# Altium PCB V2_2.PcbDoc
Units mm, origin at the board's own origin, x right, y up, seen from the top; angles counter-clockwise.
Board outline 59.92 x 90.81 mm, 4 copper layers (Top Layer, VCC, GND, Bottom Layer), stack 0.603 mm thick; 30 components, 24 nets, 172 pads, 29 vias.
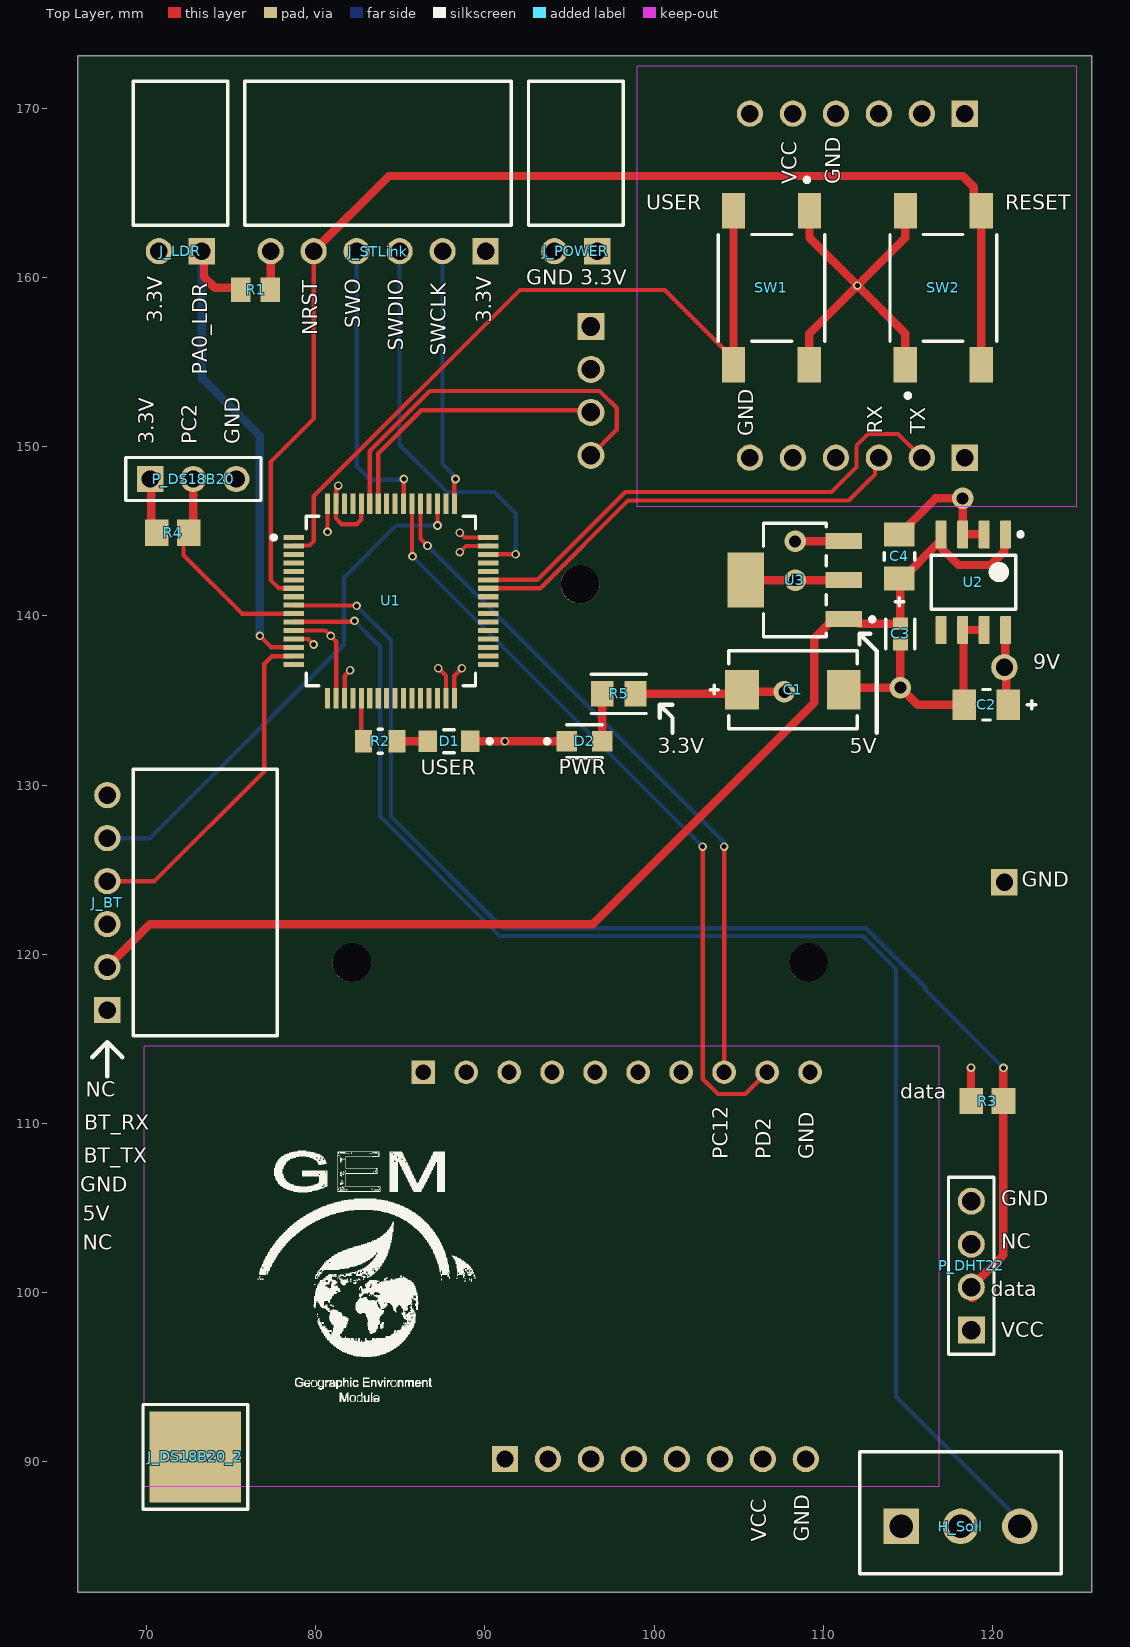
[diagram p0: Top Layer view]
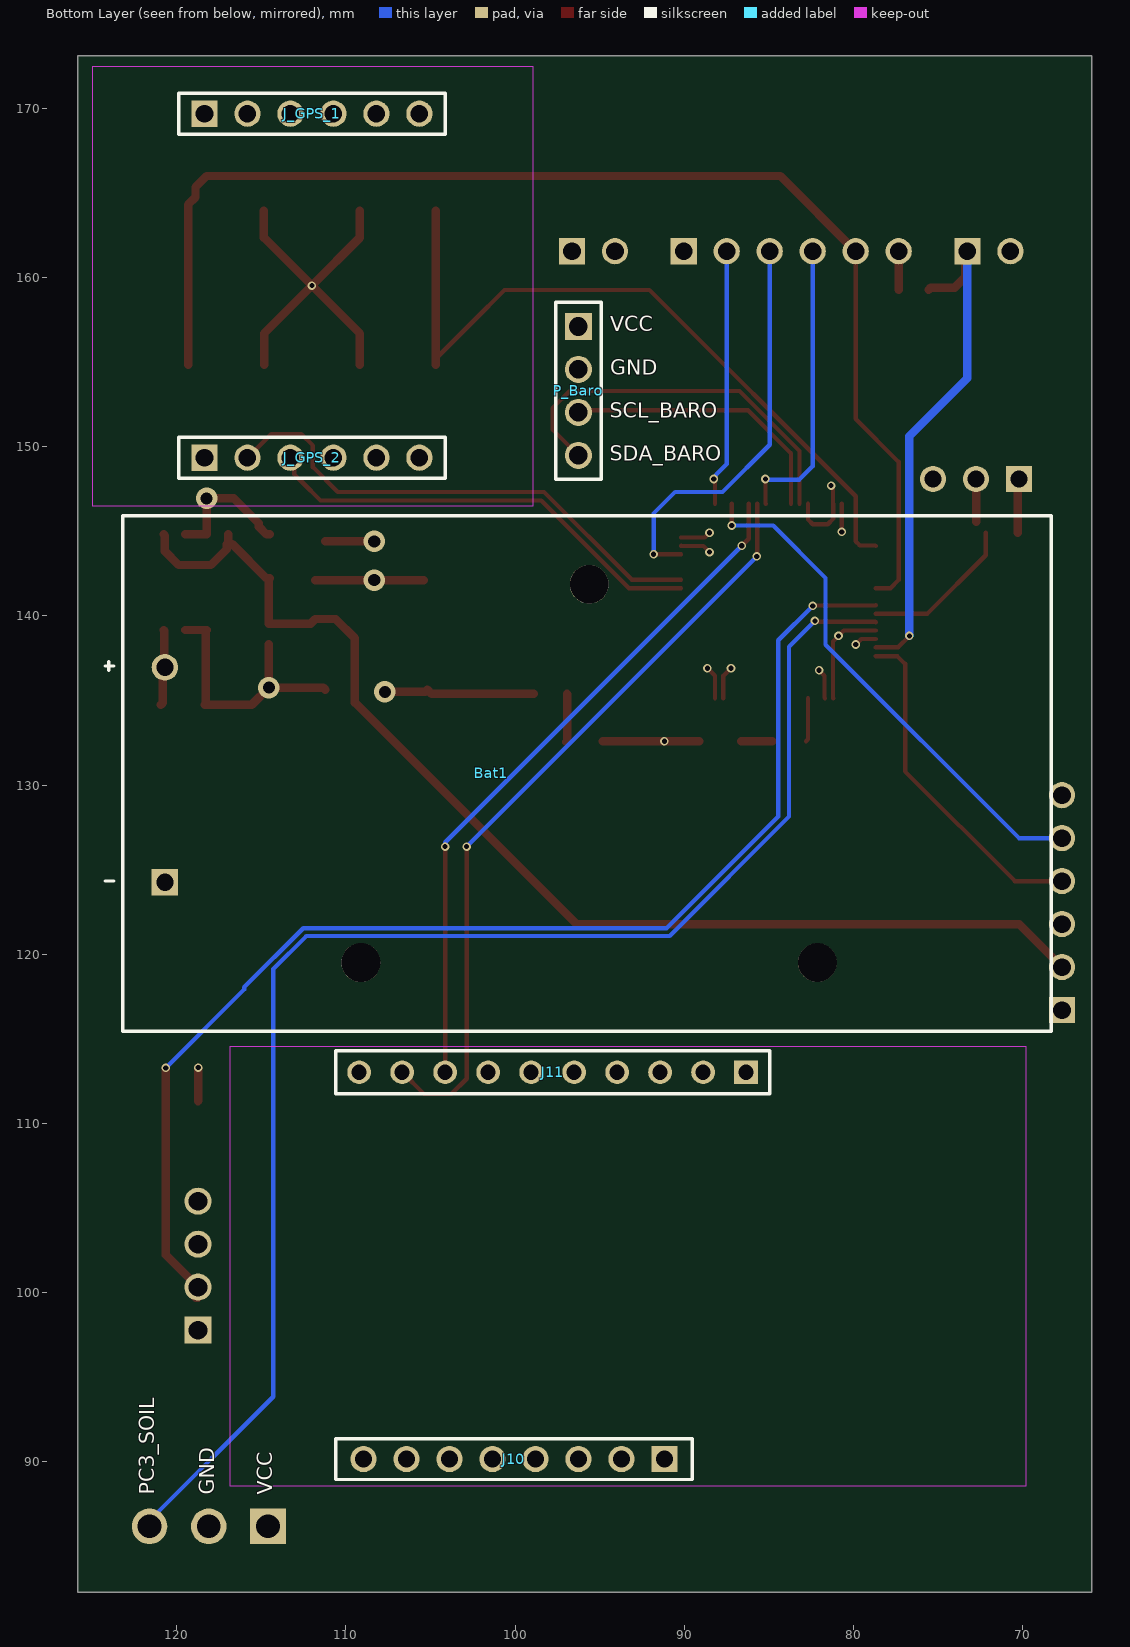
[diagram p1: Bottom Layer view, seen from below]
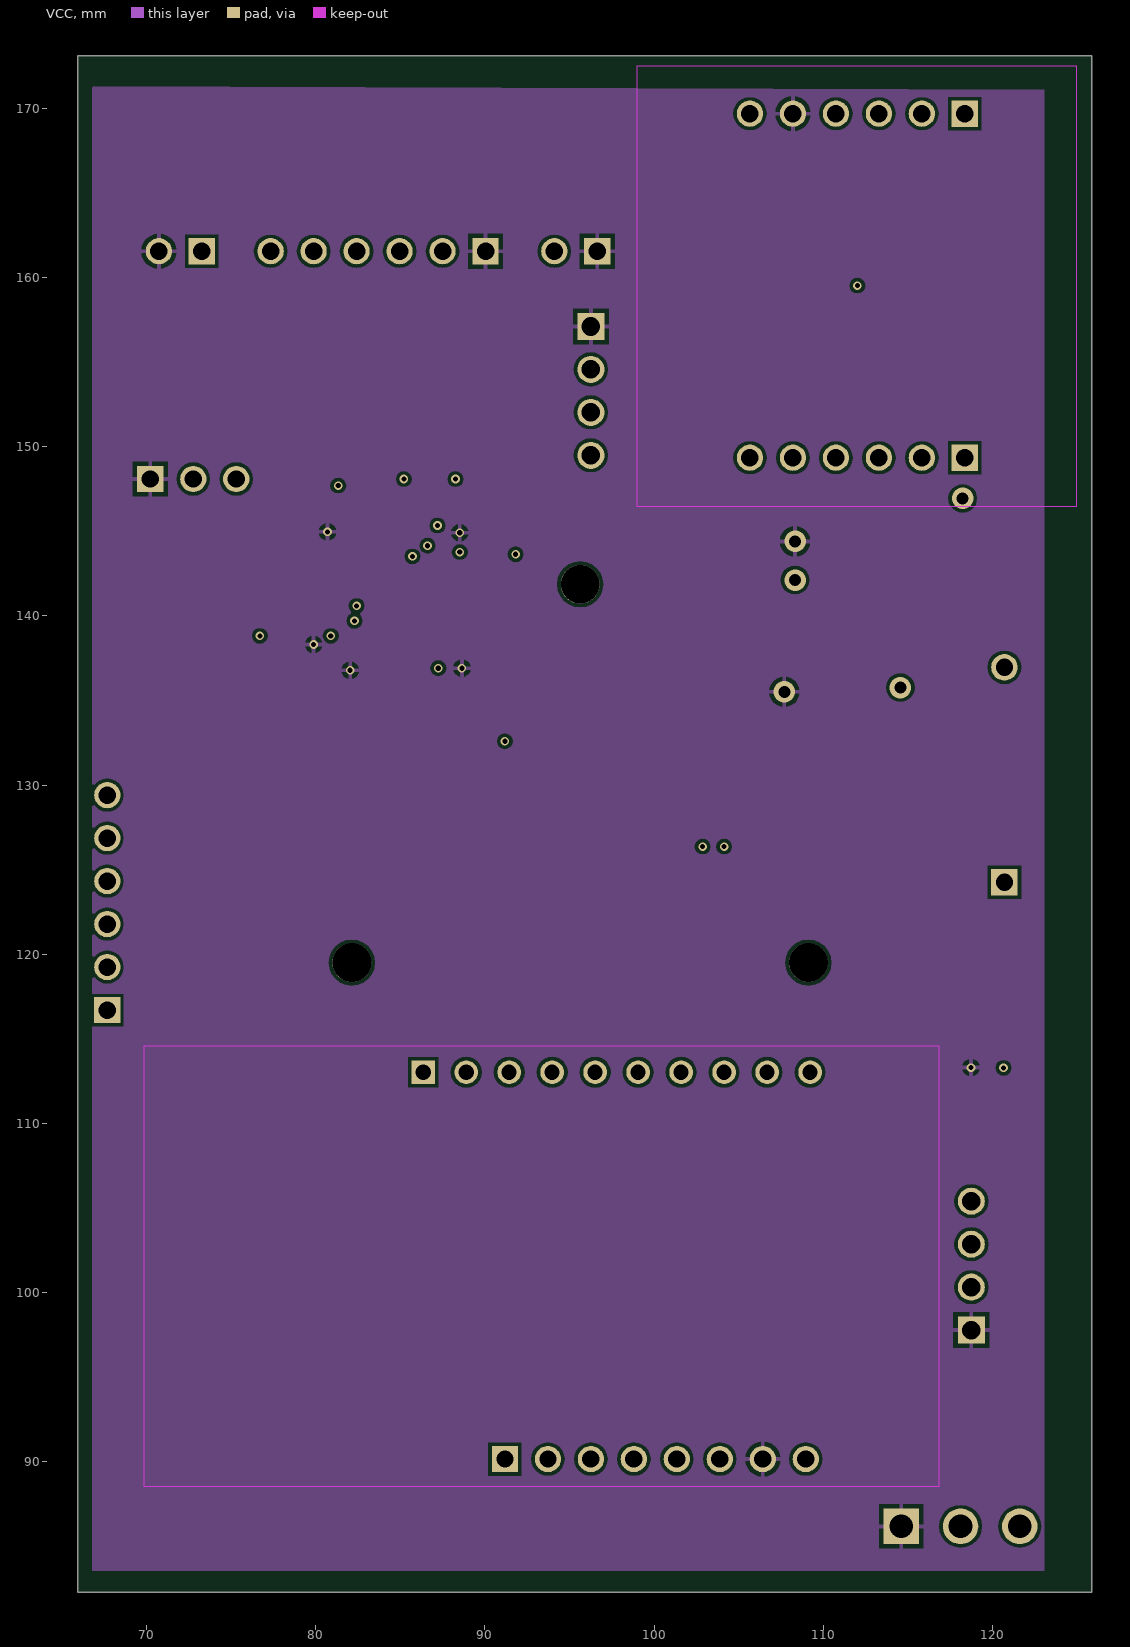
[diagram p2: VCC]
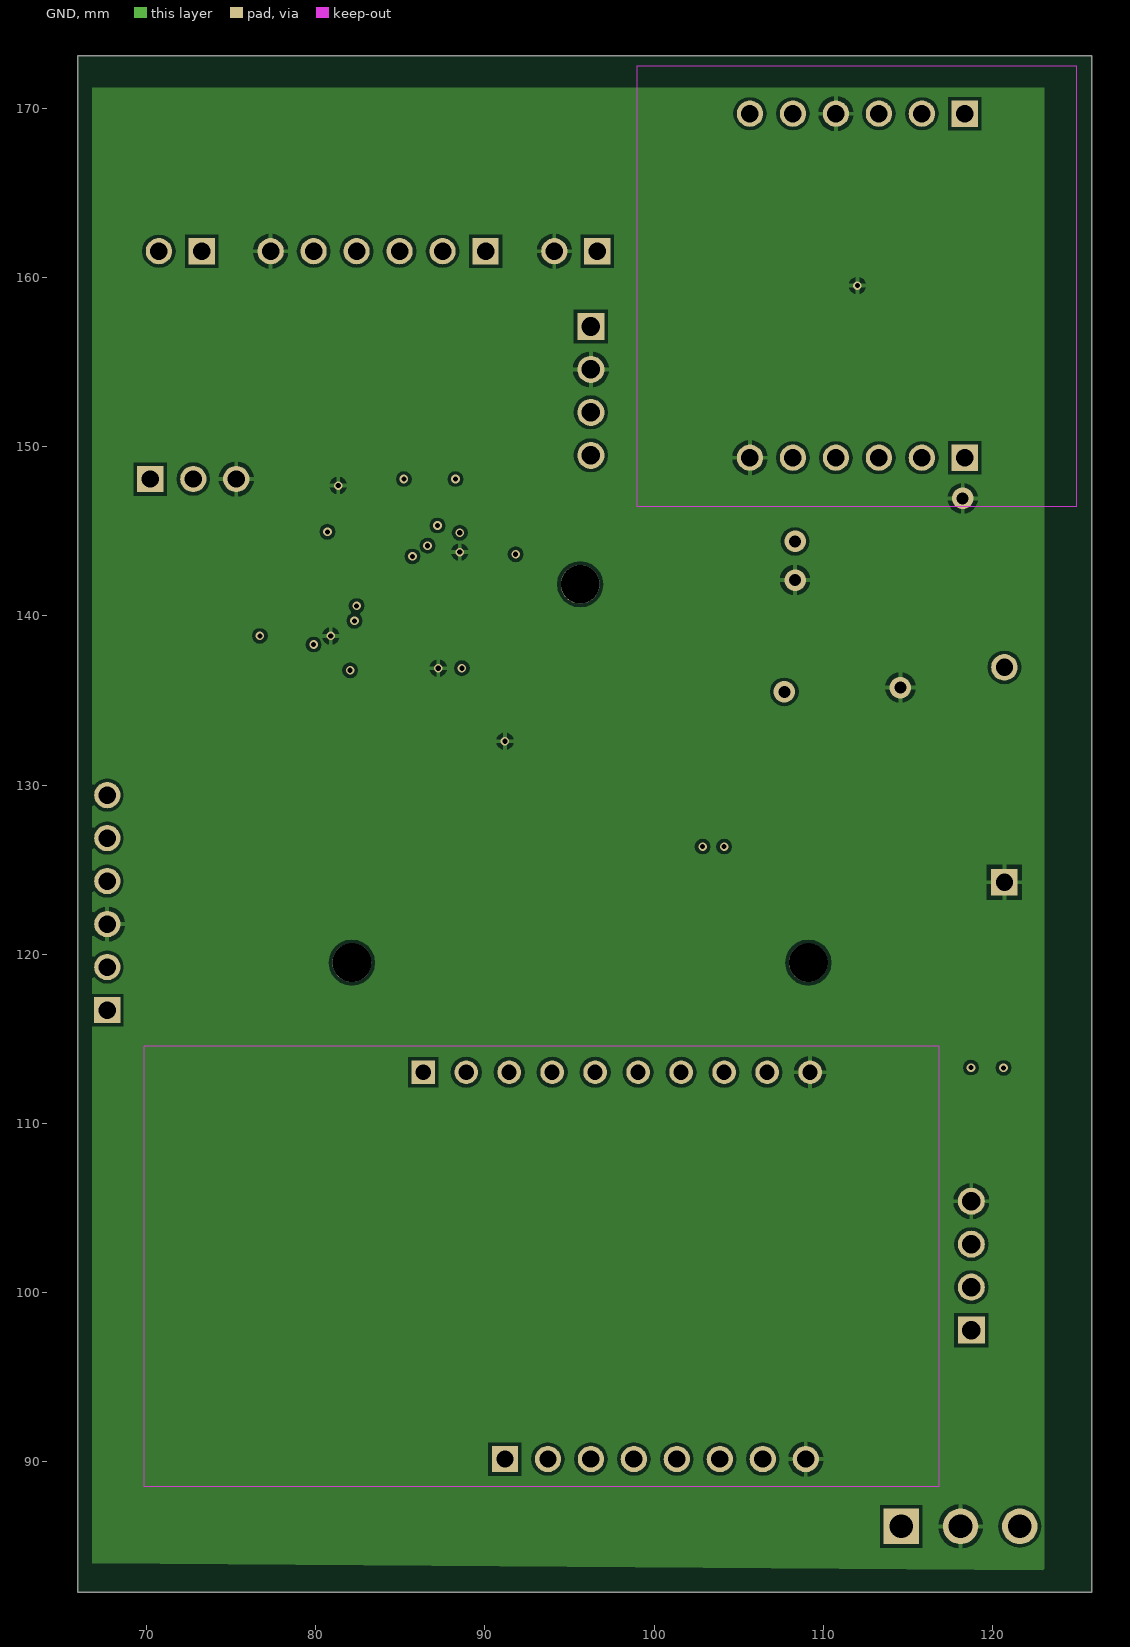
[diagram p3: GND]
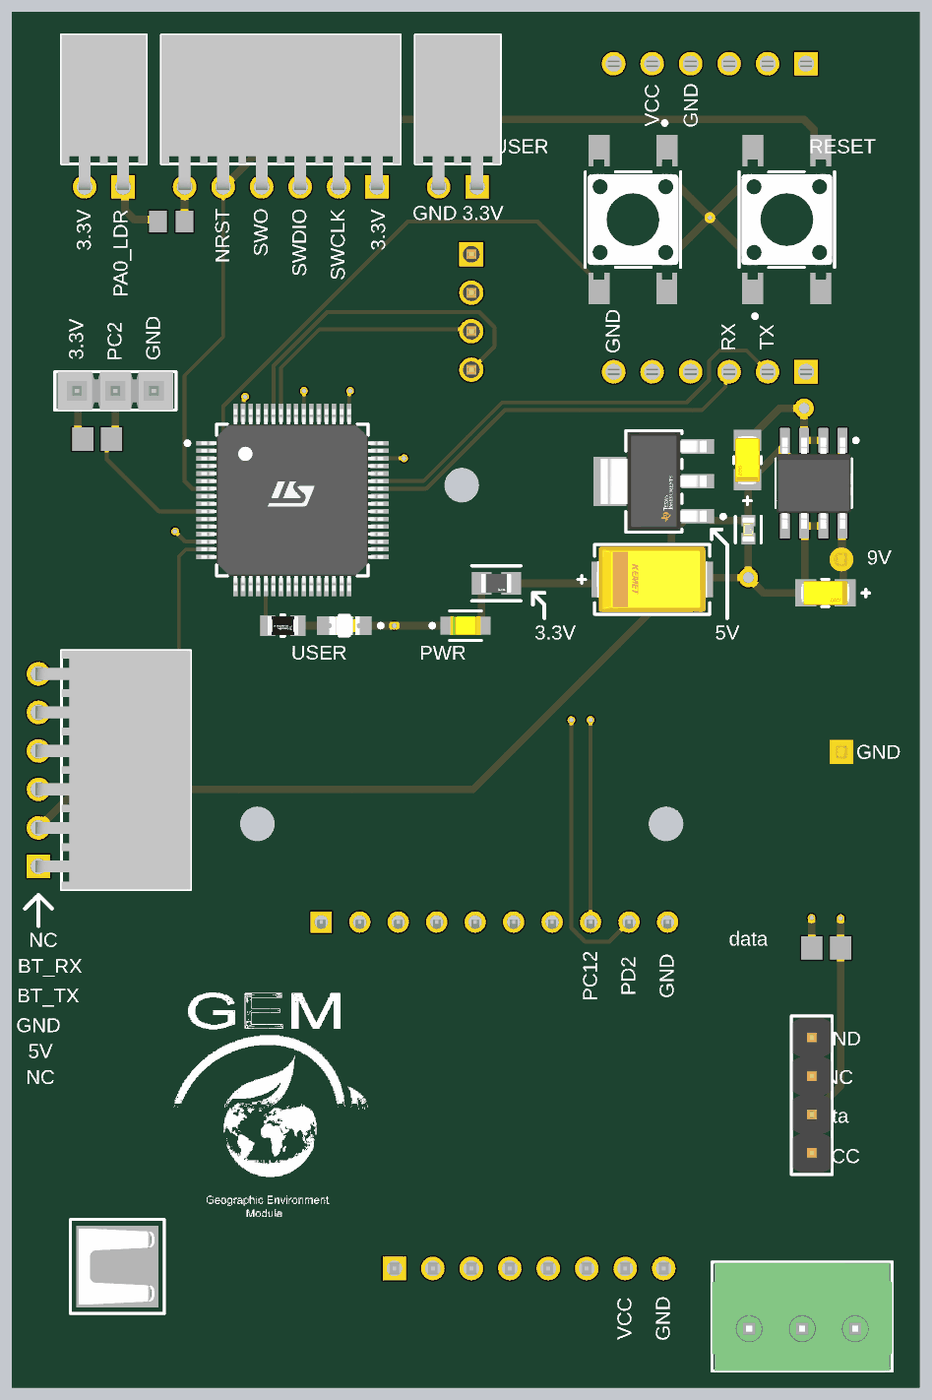
[diagram p4: 3D render of the assembled board from above, using the file's embedded part models]
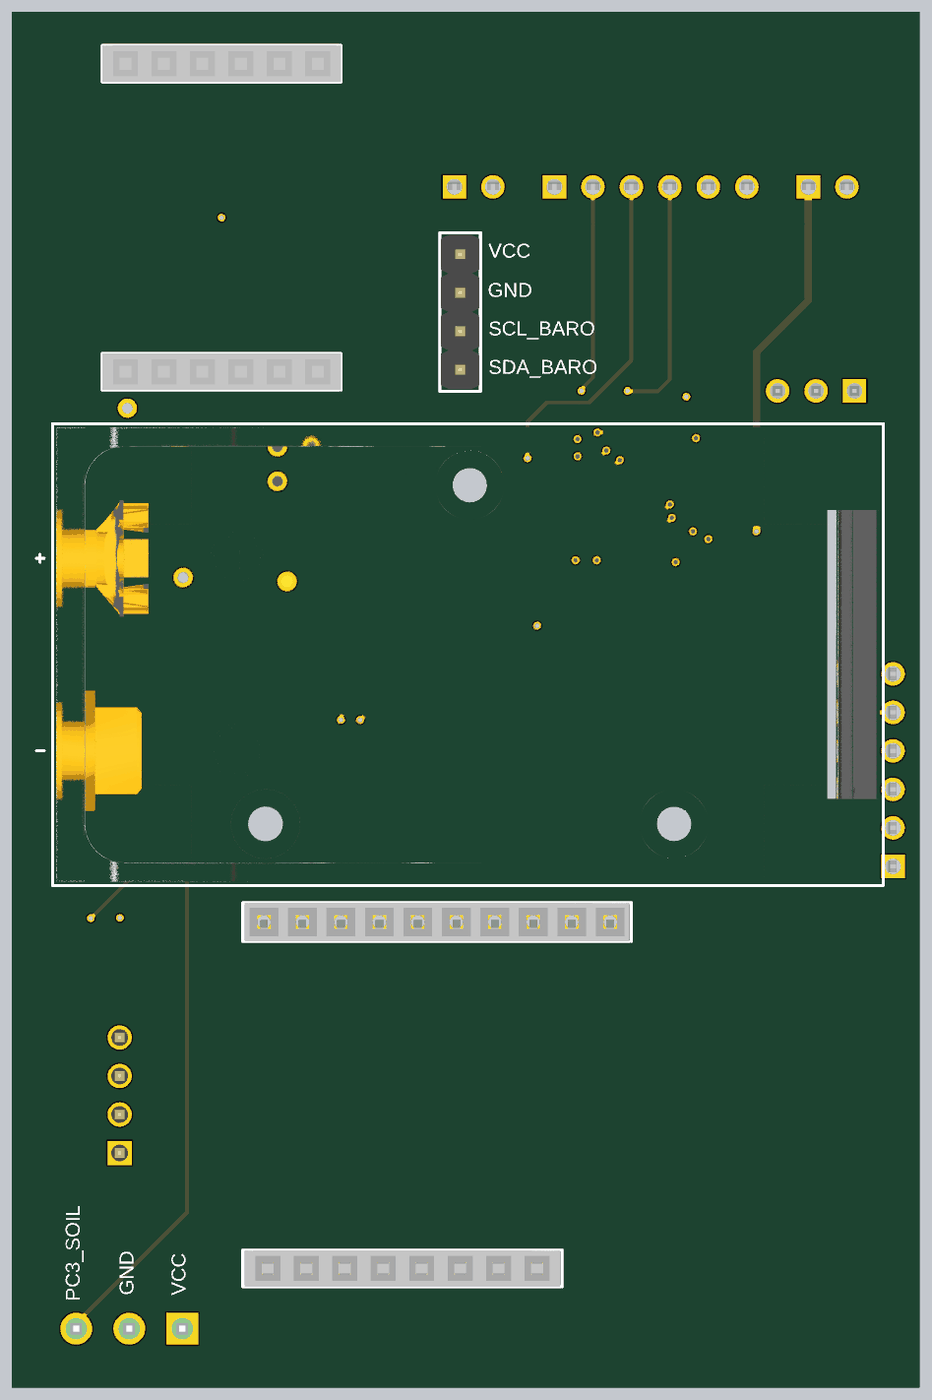
[diagram p5: 3D render of the assembled board from below, using the file's embedded part models]

## Layer stack, top to bottom
Top Solder: solder mask 0.0102, Solder Resist, Dk 3.5
Top Layer: signal copper 0.0356
Dielectric 2: prepreg 0.0711, PP-006, Dk 4.1
VCC: signal copper 0.035
Dielectric 1: dielectric 0.32, FR-4, Dk 4.8
GND: signal copper 0.035
Dielectric 3: prepreg 0.0711, PP-006, Dk 4.1
Bottom Layer: signal copper 0.0356
Bottom Solder: solder mask 0.0102, Solder Resist, Dk 3.5

## Board outline
125.857,173.101 125.857,82.296 65.939,82.296 65.939,173.101

## Design rules (kind name [scope] priority, off if disabled: settings)
Clearance [All] p1: gap=0.2 ignorepadtopadclearanceinfootprint=TRUE except(0: Arc-Hole Track-Hole SMDPad-Hole THPad-Hole Via-Hole Fill-Hole Poly-Hole Region-Hole Text-Hole)
PolygonConnect [All] p1: connectstyle=Relief reliefconductorwidth=0.254 reliefentries=4 polygonreliefangle="90 Angle" airgapwidth=0.254
RoomDefinition V2_2 [InComponentClass('V2_2')] p1 off: confinementstyle=ConfineIn formatcopy=TRUE lockcomponents=FALSE outline 0,85.09 22.098,85.09 22.098,66.802 0,66.802
RoutingVias [All] p1: holewidth=0.305 width=0.508 viastyle="Through Hole" minholewidth=0.305 minwidth=0.508 maxholewidth=0.711 maxwidth=1.27
SolderMaskExpansion [All] p1: expansion=0.102 istentingtop=FALSE
Width [All] p1: maxlimit=0.5 minlimit=0.254 preferedwidth=0.5 minimp=50.000000 maximp=50.000000 favimp=50.000000
30 further rules are at their usual default settings.

## Components (designator, comment, footprint, x,y, rotation, side; value= is the part's Value field where it differs from the comment)
Bat1 "BH9VPC" FP-BH9VPC-MFG 95.758,130.683 r0 bottom
C1 "T491D336K035AT" FP-T491D336K035AT-MFG 108.204,135.636 r180 top
C2 "TAJS105K020RNJ" FP-TAJS-MFG 119.634,134.747 r0 top
C3 "C0603C274K8PACTU" FP-C0603C-CF-MFG 114.554,138.931 r270 top value="0.27 μF"
C4 "TAJS105K020RNJ" FP-TAJS-MFG 114.493,143.51 r270 top
D1 "LTST-C171KGKT" FP-LTST-C171KGKT-MFG 87.884,132.588 r180 top
D2 "LTST-C170YKT" FP-LTST-C170YKT-MFG 95.885,132.588 r0 top
H_Soil "691321100003" 691321100003 118.11,86.995 r0 top
J10 "SSQ-108-01-T-S" SMTC-SSQ-108-01-X-S 91.186,90.17 r0 bottom
J11 "BCS-110-F-S-TE" SMTC-BCS-110-X-S-TE 86.36,113.03 r0 bottom
J_BT "SSW-106-02-G-S-RA" SMTC-SSW-106-02-X-S-RA 67.691,116.704 r90 top
J_DS18B20_2 "S8111-46R" FP-S8111-46R-MFG 72.898,90.297 r90 top
J_GPS_1 "SSW-106-02-T-S" SMTC-SSW-106-02-X-S 118.364,169.672 r180 bottom
J_GPS_2 "SSW-106-02-T-S" SMTC-SSW-106-02-X-S 118.364,149.341 r180 bottom
J_LDR "SSW-102-02-G-S-RA" SMTC-SSW-102-02-X-S-RA 73.279,161.544 r180 top
J_POWER "SSW-102-02-G-S-RA" SMTC-SSW-102-02-X-S-RA 96.647,161.544 r180 top
J_STLink "SSW-106-02-G-S-RA" SMTC-SSW-106-02-X-S-RA 90.043,161.544 r180 top
P_Baro "61300411121" 61300411121 96.266,153.289 r270 bottom
P_DHT22 "61300411121" 61300411121 118.745,101.6 r90 top
P_DS18B20 "TSW-103-07-G-S" SMTC-TSW-103-07-X-S 70.231,148.082 r0 top
R1 "ERJ6ENF2200V" RESC2013X70X40NL20T20 76.454,159.258 r180 top
R2 "RP73PF2A499RBTDF" FP-RP73P-2A-MFG 83.82,132.588 r180 top value=499Ω
R3 "ERA6AEB472V" RESC2013X60X40ML20T25 119.695,111.325 r180 top
R4 "ERA6AEB472V" RESC2013X60X40ML20T25 71.562,144.907 r180 top
R5 "RP73D2A1K0BTG" FP-RP732A-IPC_A 97.917,135.382 r180 top
SW1 "FSM2JSMAA" FP-FSM2JSMAA-MFG 106.934,159.385 r0 top
SW2 "FSM2JSMAA" FP-FSM2JSMAA-MFG 117.094,159.385 r180 top
U1 "STM32L073RZT6" FP-LQFP64-5W-MFG 84.451,140.878 r0 top
U2 "UCC381DP-5" D0008A_M 118.872,141.986 r270 top
U3 "LM3940IMP-3.3/NOPB" FP-DCY0004A-MFG 108.313,142.113 r180 top

## Footprints (in the part's own frame and the unit in brackets; to place one, negate y for a bottom-side part, rotate by r counter-clockwise, add the part's x,y. Pads: shape width x height; smd on the part's side, far side on the other; paste and mask are expansions set on the pad)
61300411121 [mm] "Pin Header, pitch 2.54 mm, THT, Vertical, single row, 4p"
  rect 1.6x1.6 hole 1.1: 1(-3.81,0)
  round 1.6 hole 1.1: 2(-1.27,0) 3(1.27,0) 4(3.81,0)
  silkscreen extent -5.23,-1.35 5.23,1.35, body extent -5.08,-1.27 5.08,1.27, height 8.57
691321100003 [mm] "Vertical PCB Header, pitch 3.5mm, 03p"
  rect 2.1x2.1 hole 1.4: 1(-3.5,-0.8)
  round 2.1 hole 1.4: 2(0,-0.8) 3(3.5,-0.8)
  silkscreen extent -5.95,-3.6 5.95,3.6, body extent -5.95,-3.6 5.95,3.6, height 9.3
D0008A_M [mm] "SOIC, 8-Leads, Body 5x4mm, Pitch 1.27mm, IPC Low Density"
  rrect15% 1.65x0.65 smd: 1(-2.825,1.905) 2(-2.825,0.635) 3(-2.825,-0.635) 4(-2.825,-1.905) 5(2.825,-1.905) 6(2.825,-0.635) 7(2.825,0.635) 8(2.825,1.905)
  silkscreen extent -2.95,-2.5 1.6,2.91, body extent -3,-2.45 3,2.45, height 1.63
FP-BH9VPC-MFG [mil]
  rect 61.65x61.65 hole 40 paste-39370.1 mask+0: 1(982,253)
  round 61.65 hole 40 paste-39370.1 mask+0: 2(982,-247)
  round 90.16 hole 90.16 unplated paste-39370.1 mask+0: ""(-536,440) ""(-5,-440) ""(526,440)
  silkscreen extent -1080,-600 1121,600, body extent -1070,-590 1070,590, height 812
FP-C0603C-CF-MFG [mm]
  rect 0.75x0.9 smd paste+0 mask+0: 1(-0.6,0) 2(0.6,0)
  silkscreen extent -0.87,-0.85 0.88,0.85, body extent -1.2,-0.6 1.2,0.6, height 0.25
FP-DCY0004A-MFG [mm]
  rect 2.15x0.95 smd paste+0 mask+0: 1(-2.9,2.3) 2(-2.9,0) 3(-2.9,-2.3)
  rect 2.15x3.25 smd paste+0 mask+0: 4(2.9,0)
  silkscreen extent -4.7,-3.35 1.85,3.35, body extent -4.08,-3.45 4.08,3.45, height 0.25
FP-FSM2JSMAA-MFG [mm]
  rect 1.38x2.1 smd paste+0 mask+0: 1(2.25,4.55) 2(2.24,-4.55) 3(-2.24,4.55) 4(-2.24,-4.55)
  silkscreen extent -3.15,-3.15 3.15,6.5, body extent -3.25,-5.7 3.25,5.7, height 0.25
FP-LQFP64-5W-MFG [mm]
  rect 1.2x0.3 smd paste+0 mask+0: 1(-5.75,3.75) 2(-5.75,3.25) 3(-5.75,2.75) 4(-5.75,2.25) 5(-5.75,1.75) 6(-5.75,1.25) 7(-5.75,0.75) 8(-5.75,0.25) 9(-5.75,-0.25) 10(-5.75,-0.75) 11(-5.75,-1.25) 12(-5.75,-1.75) 13(-5.75,-2.25) 14(-5.75,-2.75) 15(-5.75,-3.25) 16(-5.75,-3.75) 33(5.75,-3.75) 34(5.75,-3.25) 35(5.75,-2.75) 36(5.75,-2.25) 37(5.75,-1.75) 38(5.75,-1.25) 39(5.75,-0.75) 40(5.75,-0.25) 41(5.75,0.25) 42(5.75,0.75) 43(5.75,1.25) 44(5.75,1.75) 45(5.75,2.25) 46(5.75,2.75) 47(5.75,3.25) 48(5.75,3.75)
  rect 0.3x1.2 smd paste+0 mask+0: 17(-3.75,-5.75) 18(-3.25,-5.75) 19(-2.75,-5.75) 20(-2.25,-5.75) 21(-1.75,-5.75) 22(-1.25,-5.75) 23(-0.75,-5.75) 24(-0.25,-5.75) 25(0.25,-5.75) 26(0.75,-5.75) 27(1.25,-5.75) 28(1.75,-5.75) 29(2.25,-5.75) 30(2.75,-5.75) 31(3.25,-5.75) 32(3.75,-5.75) 49(3.75,5.75) 50(3.25,5.75) 51(2.75,5.75) 52(2.25,5.75) 53(1.75,5.75) 54(1.25,5.75) 55(0.75,5.75) 56(0.25,5.75) 57(-0.25,5.75) 58(-0.75,5.75) 59(-1.25,5.75) 60(-1.75,5.75) 61(-2.25,5.75) 62(-2.75,5.75) 63(-3.25,5.75) 64(-3.75,5.75)
  silkscreen extent -7.05,-5 5,5, body extent -6.45,-6.45 6.45,6.45, height 0.25
FP-LTST-C170YKT-MFG [mm]
  rect 1.2x1.2 smd paste+0 mask+0: 1(-1.05,0) 2(1.05,0)
  silkscreen extent -2.32,-0.97 1.05,0.97, body extent -1.75,-0.77 1.75,0.77, height 0.25
FP-LTST-C171KGKT-MFG [mm]
  rect 1.1x1.25 smd paste+0 mask+0: 1(-1.25,0) 2(1.25,0)
  silkscreen extent -2.53,-0.67 0.33,0.67, body extent -1.9,-0.77 1.9,0.77, height 0.25
FP-RP73P-2A-MFG [mm]
  rect 1x1.35 smd paste+0 mask+0: 1(-1,0) 2(1,0)
  silkscreen extent -0.13,-0.7 0.13,0.7, body extent -1.6,-0.8 1.6,0.8, height 0.25
FP-RP732A-IPC_A [mm]
  rect 1.306x1.508 smd paste+0 mask+0: 1(-0.976,0) 2(0.976,0)
  silkscreen extent -1.63,-1.15 1.63,1.15, body extent -2.13,-1.25 2.13,1.25, height 0.25
FP-S8111-46R-MFG [mm]
  rect 5.4x5.4 smd paste+0 mask+0: 1(0,0)
  silkscreen extent -3.1,-3.1 3.1,3.1, body extent -2.8,-2.8 2.8,2.8, height 0.25
FP-T491D336K035AT-MFG [mm]
  rect 1.99x2.33 smd paste+0 mask+0: 1(-3.01,0) 2(3.01,0)
  silkscreen extent -3.8,-2.3 4.9,2.3, body extent -4.13,-2.42 4.13,2.42, height 0.25
FP-TAJS-MFG [mm]
  rect 1.4x1.8 smd paste+0 mask+0: 1(-1.3,0) 2(1.3,0)
  silkscreen extent -0.23,-0.9 2.93,0.9, body extent -2.1,-1 2.1,1, height 0.25
RESC2013X60X40ML20T25 [mm] "Chip Resistor, 2-Leads, Body 2.00x1.25mm, IPC Low Density"
  rect 1.4x1.55 smd: 1(-0.95,0) 2(0.95,0)
  body extent -1.1,-0.72 1.1,0.72, height 0.6
RESC2013X70X40NL20T20 [mm] "Chip Resistor, 2-Leads, Body 2.00x1.25mm, IPC Medium Density"
  rect 1.15x1.45 smd: 1(-0.875,0) 2(0.875,0)
  body extent -1.1,-0.72 1.1,0.72, height 0.7
SMTC-BCS-110-X-S-TE [mm] "Box Connector Socket Strip, 1x10 Pins, Vertical, 2.54mm Pitch, Female"
  rect 1.4x1.4 hole 0.89: 1(0,0)
  round 1.4 hole 0.89: 2(2.54,0) 3(5.08,0) 4(7.62,0) 5(10.16,0) 6(12.7,0) 7(15.24,0) 8(17.78,0) 9(20.32,0) 10(22.86,0)
  silkscreen extent -1.4,-1.27 24.26,1.27, body extent -1.27,-1.27 24.13,1.27, height 7.37
SMTC-SSQ-108-01-X-S [mm] "SQ Post Socket, 1x8 Pins, Vertical, 2.54mm Pitch, Female"
  rect 1.55x1.55 hole 1.02: 1(0,0)
  round 1.55 hole 1.02: 2(2.54,0) 3(5.08,0) 4(7.62,0) 5(10.16,0) 6(12.7,0) 7(15.24,0) 8(17.78,0)
  silkscreen extent -1.65,-1.2 19.43,1.2, body extent -1.52,-1.21 19.3,1.21, height 8.51
SMTC-SSW-102-02-X-S-RA [mm] "SQ Post Socket, 1x2 Pins, Right Angle, 2.54mm Pitch, Female"
  rect 1.55x1.55 hole 1.04: 1(0,0)
  round 1.55 hole 1.04: 2(2.54,0)
  silkscreen extent -1.53,-10.03 4.07,-1.52, body extent -1.52,-10.03 4.06,0.2, height 2.41
SMTC-SSW-106-02-X-S [mm] "SQ Post Socket, 1x6 Pins, Vertical, 2.54mm Pitch, Female"
  rect 1.55x1.55 hole 1.04: 1(0,0)
  round 1.55 hole 1.04: 2(2.54,0) 3(5.08,0) 4(7.62,0) 5(10.16,0) 6(12.7,0)
  silkscreen extent -1.53,-1.2 14.23,1.2, body extent -1.52,-1.21 14.22,1.21, height 8.51
SMTC-SSW-106-02-X-S-RA [mm] "SQ Post Socket, 1x6 Pins, Right Angle, 2.54mm Pitch, Female"
  rect 1.55x1.55 hole 1.04: 1(0,0)
  round 1.55 hole 1.04: 2(2.54,0) 3(5.08,0) 4(7.62,0) 5(10.16,0) 6(12.7,0)
  silkscreen extent -1.53,-10.03 14.23,-1.52, body extent -1.52,-10.03 14.22,0.2, height 2.41
SMTC-TSW-103-07-X-S [mm] ".025 SQ Post Terminal Strip Assembly, 1x3 Pins, Vertical, 2.54mm Pitch, Male"
  rect 1.55x1.55 hole 1.02: 1(0,0)
  round 1.55 hole 1.02: 2(2.54,0) 3(5.08,0)
  silkscreen extent -1.46,-1.27 6.54,1.27, body extent -1.27,-1.27 6.35,1.27, height 8.38

## Part data
Bat1: library part CMP-136216-000001-1, "BATTERY HOLDER 9V PC PIN", Manufacturer="Memory Protection Devices", PACKAGE=0, Voltage Rating=9V, Automotive=No, Category=Batt, ComponentLink2Description=Datasheet, ComponentLink2URL=http://www.memoryprotectiondevices.com/datasheets/BH9VPC-datasheet.pdf, Conn Orientation=Vertical, Contact Material=Nickel, Device Class L1=Connectors, Device Class L2=unset, Device Class L3=unset, Digikey Description="BATTERY HOLDER 9V PC PIN", HEIGHT=21.12mm, Is Female=yes, Lead Free=Yes, Manufacturer Part Number=BH9VPC, Number Of Contacts=2, Octopart=https://octopart.com/bh9vpc-memory+protection+devices-22788154, RoHS=TRUE
C1: library part CMP-03017-000056-1, "CAP TANT 33UF 10% 35V 2917", Capacitance=33uF, Case Code (Imperial)=2917, Case Code (Metric)=7343, Dielectric Material=Tantalum, ESR (Equivalent Series Resistance)=600mR, Leakage Current=11.6uA, Max Operating Temperature=125°C, Min Operating Temperature=-55°C, Package Quantity=1, Tolerance=10%, Voltage Rating=35V, Case/Package=2917, Construction=Flat, Depth=4.3mm, Dissipation Factor=6%, Features="General Purpose", HEIGHT=3.1mm, Height - Seated (Max)=0.122inch, Lead Free="Lead Free", Length=7.3mm, Life (Hours)=2000Hour, Mount="Surface Mount", Number of Pins=2, Packaging="Tape and Reel", Polarity=Polar, Radiation Hardening=No, REACH SVHC="No SVHC", RoHS Compliant=Yes, Series=T491, Termination=SMD/SMT, Voltage Rating (DC)=35V, Width=0.169inch
C2 C4: library part CMP-04424-000159-1, "1uF 20V  ±10% 12Ω 1206  SMD Tantalum Capacitor", Capacitance=1uF, Case Code (Imperial)=1206, Case Code (Metric)=3216, ESR (Equivalent Series Resistance)=12R, Leakage Current=500nA, Max Operating Temperature=125°C, Min Operating Temperature=-55°C, Package Quantity=2500, Tolerance=10%, Voltage=20V, Case/Package=1206, Construction=Flat, Depth=1.6mm, Dissipation Factor=4%, Features="General Purpose", HEIGHT=1.2mm, Height - Seated (Max)=0.047inch, Lead Free="Lead Free", Length=3.2mm, Mount="Surface Mount", Packaging="Tape and Reel", Polarity=Polar, Radiation Hardening=No, RoHS Compliant=Yes, Series=TAJ, Termination=SMD/SMT, Voltage Rating=20V, Voltage Rating (DC)=20V, Weight=0.000571oz, Width=1.6mm
C3: library part CMP-2006-02267-2, "CAP CER 0.27UF 10V X5R 0603", Capacitance="0.27 μF", Manufacturer=KEMET, PACKAGE=C0603C-CF, Temperature="-55°C to +125°C", Temperature Characteristic=X5R, Temperature Coefficient=30ppm/°C, Temperature Range High=+125°C, Temperature Range Low=-55°C, Tolerance=0.1, Voltage Rating="10 V", Automotive=Yes, Automotive Grade="Grade 1", Category=Cap, ComponentLink2Description=Datasheet, ComponentLink2URL=https://api.kemet.com/component-edge/download/datasheet/C0603C100J5GACAUTO.pdf, Device Class L1="Passive Components", Device Class L2=Capacitors, Device Class L3="Ceramic Capacitors", Digikey Description="CAP CER 0.27UF 10V X5R 0603", HEIGHT=0.87mm, Lead Free=Yes, Manufacturer Part Number=C0603C274K8PACTU, Material=Ceramic, Mouser Description="Capacitor; Ceramic; Cap; .270uF; Tol+10%; SMT; Vol-Rtg 10V; X5R; TR", Octopart=https://octopart.com/c0603c274k8pactu-kemet-132530, RoHS=TRUE
D1: library part CMP-22017-000037-1, "LED GREEN CLEAR SMD", Case Code (Imperial)=0805, Case Code (Metric)=2012, Color=Green, Forward Current=30mA, Forward Voltage=2.4V, Lens Color=Colorless, Max Operating Temperature=85°C, Min Operating Temperature=-55°C, Package Quantity=1, Power Dissipation=75mW, Reverse Voltage=5V, Test Current=20mA, Case/Package=0805, Depth=1.25mm, Dominant Wavelength=571nm, HEIGHT=0.8mm, Illumination Color=Green, Lead Free="Lead Free", Length=2mm, Lens Style=Rectangular, Lens Transparency=Clear, Luminous Intensity=35mcd, Mount="Surface Mount", Number of Elements=1, Number of LEDs=1, Number of Pins=2, Packaging="Tape and Reel", Power Rating=75mW, Radiation Hardening=No, Viewing Angle=130°, Wavelength=574nm, Width=1.25mm
D2: library part CMP-1674-00003-7, "LED YELLOW CLEAR SMD", Case Code (Imperial)=0805, Case Code (Metric)=2012, Color=Yellow, Forward Current=20mA, Forward Voltage=2.1V, Lens Color=Colorless, Max Operating Temperature=85°C, Min Operating Temperature=-55°C, Package Quantity=1, Power Dissipation=60mW, Reverse Voltage=5V, Test Current=10mA, Case/Package=0805, Depth=1.6mm, Dominant Wavelength=588nm, HEIGHT=1.1mm, Illumination Color=Yellow, Lead Free="Lead Free", Length=3.2mm, Lens Style=Diffused, Lens Transparency=Clear, Luminous Intensity=6mcd, Mount="Surface Mount", Number of Elements=1, Number of LEDs=1, Number of Pins=2, Packaging="Tape and Reel", Power Rating=60mW, Radiation Hardening=No, RoHS Compliant=Yes, Series="CHIPLED 0805", Viewing Angle=130°, Wavelength=585nm, Width=1.25mm
H_Soil: library part CMP-1502-01784-1, "Serie 3211 - 3.50mm Vertical PCB Header WR-TBL, 3 pin", Manufacturer="Wurth Elektronik", Operating Temperature=-40to105degC, Datasheet URL=http://katalog.we-online.de/em/datasheet/6913211000xx.pdf, Gender=Male, Manufacturer URL=http://www.we-online.de, Mounting Technology=THT, Package Reference=691321100003, Packaging=Box, Part Number=691321100003, Pin Number=3, Pitch=3.50mm, Publisher=WurthElektronik
J10: library part CMP-1023-00293-1, "SQ Post Socket, Through-hole, Vertical, -55 to 105 degC, 2.54 mm Pitch, 8-Pin, Female, RoHS", Manufacturer=Samtec, Temperature Range="-55 to 105 degC", ComponentLink1Description="Manufacturer URL", ComponentLink1URL=http://www.samtec.com, ComponentLink2Description=Datasheet, ComponentLink2URL=http://www.samtec.com/documents/webfiles/pdf/SSQ_TH.PDF, ComponentLink3Description="Package Specification", ComponentLink3URL=http://www.samtec.com/documents/webfiles/cpdf/SSQ-1XX-XX-XXX-X-XX-XXX-XX-X-MKT.pdf, DatasheetVersion=F-214, Mounting Technology=Through-hole, Orientation=Vertical, PackageDescription="Assembly, Socket Strip .025[0.64] SQ Tail", PackageReference=SSQ-108-01-X-S, PackageVersion="BD, 6/1987", PartNumber=SSQ-108-01-T-S, Pitch="2.54 mm", RoHS=True
J11: library part CMP-1023-00017-1, "Tiger Claw(TM) Pass-Through Socket, Vertical, -55 to 125 degC, 2.54 mm Pitch, 10-Pin, Female, RoHS", Manufacturer=Samtec, Temperature Range="-55 to 125 degC", ComponentLink1Description="Manufacturer URL", ComponentLink1URL=http://www.samtec.com, ComponentLink2Description=Datasheet, ComponentLink2URL=http://www.samtec.com/documents/webfiles/pdf/BCS.PDF, ComponentLink3Description="Package Specification", ComponentLink3URL=http://www.samtec.com/documents/webfiles/cpdf/BCS-1XX-XXX-X-XX-XXX-MKT.pdf, DatasheetVersion=F-214, Mounting Technology=Through-hole, Orientation=Vertical, PackageDescription="Box Connector Socket Strip", PackageReference=BCS-110-X-S-TE, PackageVersion="BV, 9/1991", PartNumber=BCS-110-F-S-TE, Pitch="2.54 mm", RoHS=True
J_BT J_STLink: library part CMP-1023-00363-1, "SQ Post Socket, Through-hole, Right Angle, -55 to 125 degC, 2.54mm Pitch, 6-Pin, Female, RoHS", Manufacturer=Samtec, Temperature Range="-55 to 125 degC", ComponentLink1Description="Manufacturer URL", ComponentLink1URL=http://www.samtec.com, ComponentLink2Description=Datasheet, ComponentLink2URL=http://www.samtec.com/documents/webfiles/pdf/SSW_TH.PDF, ComponentLink3Description="Package Specification", ComponentLink3URL=http://www.samtec.com/documents/webfiles/cpdf/SSW-1XX-XX-XXX-X-XX-XXX-XX-MKT.pdf, DatasheetVersion=F-214, Mounting Technology=Through-hole, Orientation="Right Angle", PackageDescription="Assembly, Socket Strip .016 X .031 Tail", PackageReference=SSW-106-02-X-S-RA, PackageVersion="CA, 6/1987", PartNumber=SSW-106-02-G-S-RA, Pitch="2.54 mm", RoHS=True
J_DS18B20_2: library part CMP-15817-000008-1, "CBL CLIP C-TYPE SILVER SOLDER", Color=Silver, Package Quantity=1500, Wire/Cable Color=Grey, Depth=5mm, HEIGHT=0.081inch, Length=5mm, Material=Bronze, Material Thickness=0.008inch, Mount=Solder, Orientation=Straight, Packaging="Tape and Reel", Radiation Hardening=No, REACH SVHC="No SVHC", Width=5mm
J_GPS_1 J_GPS_2: library part CMP-1023-00360-1, "SQ Post Socket, Through-hole, Vertical, -55 to 105 degC, 2.54mm Pitch, 6-Pin, Female, RoHS", Manufacturer=Samtec, Temperature Range="-55 to 105 degC", ComponentLink1Description="Manufacturer URL", ComponentLink1URL=http://www.samtec.com, ComponentLink2Description=Datasheet, ComponentLink2URL=http://www.samtec.com/documents/webfiles/pdf/SSW_TH.PDF, ComponentLink3Description="Package Specification", ComponentLink3URL=http://www.samtec.com/documents/webfiles/cpdf/SSW-1XX-XX-XXX-X-XX-XXX-XX-MKT.pdf, DatasheetVersion=F-214, Mounting Technology=Through-hole, Orientation=Vertical, PackageDescription="Assembly, Socket Strip .016 X .031 Tail", PackageReference=SSW-106-02-X-S, PackageVersion="CA, 6/1987", PartNumber=SSW-106-02-T-S, Pitch="2.54 mm", RoHS=True
J_LDR J_POWER: library part CMP-1023-00325-1, "SQ Post Socket, Through-hole, Right Angle, -55 to 125 degC, 2.54 mm Pitch, 2-Pin, Female, RoHS", Manufacturer=Samtec, Temperature Range="-55 to 125 degC", ComponentLink1Description="Manufacturer URL", ComponentLink1URL=http://www.samtec.com, ComponentLink2Description=Datasheet, ComponentLink2URL=http://www.samtec.com/documents/webfiles/pdf/SSW_TH.PDF, ComponentLink3Description="Package Specification", ComponentLink3URL=http://www.samtec.com/documents/webfiles/cpdf/SSW-1XX-XX-XXX-X-XX-XXX-XX-MKT.pdf, DatasheetVersion=F-214, Mounting Technology=Through-hole, Orientation="Right Angle", PackageDescription="Assembly, Socket Strip .016 X .031 Tail", PackageReference=SSW-102-02-X-S-RA, PackageVersion="CA, 6/1987", PartNumber=SSW-102-02-G-S-RA, Pitch="2.54 mm", RoHS=True
P_Baro P_DHT22: library part CMP-1502-01064-1, "THT Vertical Pin Header WR-PHD, Pitch 2.54 mm, Single Row, 4 pins", Contact Resistance=20mOhm, Manufacturer="Wurth Elektronik", Operating Temperature=-40to105degC, Rated Current=3A, Withstanding Voltage=500VAC, Working Voltage=250VAC, Datasheet URL=https://katalog.we-online.de/em/datasheet/6130xx11121.pdf, Gender=Male, Manufacturer URL=http://www.we-online.de, Mounting Technology=THT, Orientation=Vertical, Package Reference=61300411121, Packaging=Bag, Part Number=61300411121, Pin Number=4, Pitch=2.54mm, Publisher=WurthElektronik, Row Number=Single
P_DS18B20: library part CMP-1024-00333-1, "0.025\" SQ Post Header, Through-hole, Vertical, -55 to 125 degC, 2.54 mm Pitch, 3-Pin, Male, RoHS", Manufacturer=Samtec, Temperature Range="-55 to 125 degC", ComponentLink1Description="Manufacturer URL", ComponentLink1URL=http://www.samtec.com, ComponentLink2Description=Datasheet, ComponentLink2URL=http://www.samtec.com/documents/webfiles/pdf/TSW_TH.PDF, ComponentLink3Description="Package Specification", ComponentLink3URL=http://www.samtec.com/documents/webfiles/cpdf/TSW-XXX-XX-XXX-X-XX-XXX-MKT.pdf, DatasheetVersion=F-214, Mounting Technology=Through-hole, Orientation=Vertical, PackageDescription=".025[0.64] SQ. Post Terminal Strip Assembly", PackageReference=TSW-103-07-X-S, PackageVersion="DM, 8/1988", PartNumber=TSW-103-07-G-S, Pitch="2.54 mm", RoHS=True
R1: library part CMP-2001-00044-1, Manufacturer=Panasonic, Part Number=ERJ6ENF2200V
R2: library part CMP-03211-004360-1, "RP73P 0805 499Ω 0.25W 25ppm/°C 0.10% 150V", Manufacturer="TE Connectivity", PACKAGE=RP73P-2A, Power Rating=0.25W, Resistance=499Ω, Temperature="-55°C to +155°C", Temperature Coefficient=25ppm/°C, Temperature Range High=+155°C, Temperature Range Low=-55°C, Tolerance=0.001, Voltage Rating=150V, Automotive=No, Category=Res, ComponentLink2Description=Datasheet, ComponentLink2URL=https://www.te.com/commerce/DocumentDelivery/DDEController?Action=srchrtrv&DocNm=1773272&DocType=DS&DocLang=English, Composition="Thin Film", Device Class L1="Passive Components", Device Class L2=Resistors, Device Class L3="Chip SMD Resistors", HEIGHT=0.65mm, Ipc Land Pattern Name=RESC200125X55, Lead Free=Yes, Manufacturer Part Number=RP73PF2A499RBTDF, Octopart=https://octopart.com/rp73pf2a499rbtdf-te+connectivity-45466959, RoHS=TRUE, Series=RP73P
R3 R4: library part CMP-2001-00644-1, Manufacturer=Panasonic, Part Number=ERA6AEB472V
R5: library part CMP-03211-009998-2, "Surface Mount Resistors, Precision Resistor, 2 Terminations, Size Code 0805, Cut Tape Length, .1%, Thin Film, 10K 0.1% 10PPM", Case Code (Imperial)=0805, Case Code (Metric)=2012, Max Operating Temperature=155°C, Min Operating Temperature=-55°C, Number of Resistors=1, Package Quantity=250, Power Rating=125mW, Resistance=1kR, Temperature Coefficient=15ppm/°C, Tolerance=0.1%, Voltage Rating=150V, Case/Package=0805, Composition="Thin Film", ELV=Compliant, HEIGHT=0.55mm, Length=2mm, Mount="Surface Mount", Number of Pins=2, Number of Terminations=2, Packaging="Cut Tape", Termination=Solder, Voltage Rating (DC)=150V, Weight=0.000194oz, Width=1.25mm
SW1 SW2: library part CMP-03402-000003-1, "SWITCH TACTILE SPST-NO 0.05A 24V", Contact Current Rating=50mA, Contact Resistance=100mΩ, Manufacturer="TE Connectivity", Operating Force=260gf, PACKAGE=0, Temperature="-35°C to +85°C", Temperature Range High=+85°C, Temperature Range Low=-35°C, Voltage Rating DC=24V, Automotive=No, Category=Switch, ComponentLink2Description=Datasheet, ComponentLink2URL=https://www.te.com/commerce/DocumentDelivery/DDEController?Action=showdoc&DocId=Customer+Drawing%7F2-1437565-7%7FV%7Fpdf%7FEnglish%7FENG_CD_2-1437565-7_V.pdf%7F2-1437565-8, Device Class L1=Electromechanical, Device Class L2=Switches, Device Class L3="Pushbutton Switches", Digikey Description="SWITCH TACTILE SPST-NO 0.05A 24V", Electromechanical Life=100000Cycles, HEIGHT=4.59mm, Lead Free=Yes, Manufacturer Part Number=FSM2JSMAA, Mount="Surface Mount", Mouser Description="Tactile Switches TACTILE 260G FORCE S", Octopart=https://octopart.com/fsm2jsmaa-te+connectivity-41720620, RoHS=TRUE, Standoff Height=0.05mm, Throw Configuration=SPST-NO
U1: library part CMP-12105-000144-1, "IC MCU 32BIT 192KB FLASH 64LQFP", Case/Package=LQFP, Frequency=32MHz, Max Operating Temperature=85°C, Max Supply Voltage=3.6V, Min Operating Temperature=-40°C, Min Supply Voltage=1.65V, Core Architecture=ARM, Interface=I2C, Memory Size=192KB, Memory Type=FLASH, Number of I/Os=51, Number of Pins=64, Oscillator Type=Internal, Packaging=Tray, Peripherals="Brown-out Detect/Reset", RAM Size=20KB, REACH SVHC="No SVHC", RoHS Compliant=Yes
U2: library part CMP-0395-00104-2, "Single Output LDO, 1 A, Fixed 5 V Output, 5.6 to 9 V Input, with Low IQ, 8-pin SOIC (D), 0 to 70 degC, Green (RoHS & no Sb/Br)", Manufacturer="Texas Instruments", Rating=Catalog, Accuracy(%)=2.5, Code_JEDEC=MS-012, ComponentLink1Description="Manufacturer URL", ComponentLink1URL=http://www.ti.com/, ComponentLink2Description=Datasheet, ComponentLink2URL=http://www.ti.com/general/docs/lit/getliterature.tsp?genericPartNumber=UCC381-5&fileType=pdf, ComponentLink3Description="Package Specification", ComponentLink3URL=http://www.ti.com/litv/pdf/msoi002j, ComponentLink4Description="URL Link1", ComponentLink4URL="Samples URL:http://www.ti.com/product/ucc381-5#samples", DatasheetVersion=SLUS214B, Eco-Plan="Green (RoHS & no Sb/Br)", Fixed Output Options(V)=5, Iout(Max)(A)=1, Iq(Typ)(mA)=0.4, Mounting Technology="Surface Mount", PackageDescription="8-Pin Plastic Small Outline, Body 4.9 x 3.9 mm, Pitch 1.27 mm", PackageReference=D0008A, PackageVersion=4040047-3/M, PartNumber=UCC381DP-5, SubFamily="Single Channel LDO", Vdo(Typ)(mV)=500, Vin(Max)(V)=9, Vin(Min)(V)=5.6, Vout Adj(Max)(V)=5, Vout Adj(Min)(V)=5
U3: library part CMP-0062-01788-4, "IC REG LINEAR 3.3V 1A SOT223-4", Case/Package=SOT-223, Current Rating=1A, Dropout Voltage=500mV, Max Input Voltage=7.5V, Max Operating Temperature=125°C, Max Output Voltage=3.3V, Min Input Voltage=4.5V, Min Operating Temperature=-40°C, Package Quantity=1000, Quiescent Current=15mA, Contact Plating=Tin, HEIGHT=1.6mm, Lead Free="Lead Free", Length=6.5mm, Max Output Current=1A, Max Supply Voltage=7.5V, Min Supply Voltage=4.5V, Mount="Surface Mount", Nominal Output Voltage=3.3V, Number of Outputs=1, Number of Pins=4, Number of Regulators=1, Output Configuration=Positive, Output Current=1A, Output Type=Fixed, Output Voltage=3.3V, Packaging="Tape and Reel", Polarity=Positive, Radiation Hardening=No, REACH SVHC="No SVHC", Series=-, Termination=SMD/SMT, Width=3.56mm

## Via types
v1: diameter 0.508, hole 0.305, Top Layer to Bottom Layer, 24 vias
v2: diameter 1.27, hole 0.711, Top Layer to Bottom Layer, 5 vias

## Nets (pads, with @x,y where several pads share a name; then routed paths per layer and width w, separated by ;. In a path a pad name is that pad's centre, name@x,y a point inside that pad or via, vN(x,y) a via of type N, cw(c..) or ccw(c..) an arc to the next point about the centre after c; other vN are vias at no path point)
5V: C3.1 C4.2 J_BT.2 U2.1 U2.4 U3.1 | length 70
  Top Layer w0.5: J_BT.2 67.691,119.253 70.222,121.784 96.384,121.784 109.474,134.874 109.474,138.674 110.613,139.813 U3.1 111.813,139.813 112.096,139.531 C3.1 114.554,142.149 C4.2 114.693,142.21 116.719,144.236 U2.4@116.892,144.236 ; U2.4 116.967,144.236 117.042,144.236 117.042,143.943 117.983,143.002 119.888,143.002 120.702,143.816 120.702,144.736 U2.1
BT_RX: J_BT.5 U1.51 | length 30.8
  Top Layer w0.254: v1(87.201,145.336) U1.51
  Bottom Layer w0.254: J_BT.5 70.231,126.864 81.661,138.294 81.661,142.24 84.757,145.336 v1(87.201,145.336)
BT_TX: J_BT.4 U1.15 | length 20.2
  Top Layer w0.254: J_BT.4 70.476,124.324 76.962,130.81 76.962,137.16 77.407,137.605 78.678,137.605 U1.15
BUTTON_USER: SW1.3 SW1.4 U1.2 | length 44.6
  Top Layer w0.254: U1.2 78.724,144.151 79.635,144.151 79.883,144.399 79.883,147.066 92.075,159.258 100.631,159.258 102.484,157.405 SW1.4@104.694,155.195
  Top Layer w0.5: SW1.4 104.694,155.195 SW1.3
GND: Bat1.1 C1.1 C2.1 C3.2 C4.1 D1.1 D2.1 H_Soil.2 J10.8 J11.10 J_BT.3 J_GPS_1.4 J_GPS_2.6 J_POWER.2 J_STLink.6 P_Baro.2 P_DHT22.4 P_DS18B20.3 R1.1 SW1.1 SW1.2 SW2.1 SW2.2 U1.12 U1.18 U1.31 U1.47 U1.60 U1.63 U2.2 U2.3 U2.6 U2.7 U3.2 U3.4 | length 75.8
  Top Layer w0.254: U1.12 80.582,139.128 81.224,138.486 81.224,135.721 81.224,135.151 U1.18 ; v1(81.334,147.695) 81.334,147.626 81.224,147.517 81.224,146.651 U1.63 81.201,145.748 81.534,145.415 82.423,145.415 82.701,145.693 U1.60 ; v1(87.249,136.906) 87.701,136.454 U1.31 ; v1(88.519,143.764) 88.883,144.128 U1.47 U1.47@90.184,144.145
  Top Layer w0.5: R1.1 77.336,159.265 77.336,161.537 J_STLink.6 ; D1.1 v1@91.059,132.588 ; v1(91.186,132.588) D2.1 ; U3.4 v2(108.331,142.113) U3.2 U3.2@111.813,142.113 ; SW1.2 109.174,156.672 v1(112.014,159.512) ; SW1.1 109.184,162.342 v1(112.014,159.512) ; C1.1 111.341,135.763 v2(114.554,135.763) ; C4.1 114.693,144.81 115.143,145.26 115.143,145.46 116.622,146.939 v2(118.237,146.939) U2.3 U2.2 ; C3.2 v2(114.554,135.763) ; SW2.1 114.844,156.682 v1(112.014,159.512) ; SW2.2 114.854,162.352 v1(112.014,159.512) ; C2.1 C2.1@118.285,134.747 ; U2.7 U2.6 118.285,139.113 C2.1@118.285,134.747 ; v2(114.554,135.763) 115.57,134.747 C2.1@118.285,134.747
  other v1: 80.899,138.811
GPS_RX: J_GPS_2.3 U1.42 | length 26.7
  Top Layer w0.254: U1.42 93.282,141.628 98.466,146.812 111.506,146.812 112.589,147.895 113.052,148.358 113.052,149.109 J_GPS_2.3
GPS_TX: J_GPS_2.2 U1.43 | length 30.5
  Top Layer w0.254: U1.43 93.106,142.128 98.298,147.32 110.49,147.32 111.957,148.787 111.957,150.057 112.649,150.749 114.416,150.749 J_GPS_2.2
LED: R2.2 U1.21 | length 2.6
  Top Layer w0.254: U1.21 82.701,132.707 R2.2
NetD1_2: D1.2 R2.1 | length 1.8
  Top Layer w0.5: R2.1 D1.2
NetD2_2: D2.2 R5.2 | length 2.9
  Top Layer w0.5: R5.2 96.938,135.379 96.938,132.591 D2.2 D2.2@96.979,132.544
NRST: J_STLink.5 SW2.3 SW2.4 U1.7 | length 73.8
  Top Layer w0.254: U1.7 77.828,141.628 77.343,142.113 77.343,149.098 79.883,151.638 J_STLink.5
  Top Layer w0.5: J_STLink.5 84.328,165.989 118.237,165.989 118.894,165.332 118.894,164.735 119.334,164.295 SW2.3
PA0_LDR: J_LDR.1 R1.2 U1.14 | length 30.5
  Top Layer w0.254: J_LDR.1 J_LDR.1@73.406,161.417 ; v1(76.708,138.811) 77.368,138.151 78.678,138.151 U1.14
  Top Layer w0.5: J_LDR.1@73.406,161.417 73.406,160.02 74.038,159.388 75.449,159.388 R1.2
  Bottom Layer w0.5: J_LDR.1 73.279,154.051 76.708,150.622 v1(76.708,138.811)
PC1_DHT: P_DHT22.2 R3.1 U1.9 | length 73.7
  Top Layer w0.254: U1.9 78.721,140.608 82.404,140.608 v1(82.423,140.589)
  Top Layer w0.5: P_DHT22.2@118.745,99.695 118.872,99.695 P_DHT22.2@119.126,99.949 ; P_DHT22.2 120.645,102.23 R3.1 120.645,113.277 120.65,113.282 v1(120.65,113.284)
  Bottom Layer w0.254: v1(82.423,140.589) 84.455,138.557 84.455,128.143 91.059,121.539 112.529,121.539 116.021,118.047 116.021,117.913 v1(120.65,113.284)
PC2_DS18B20: P_DS18B20.2 R4.1 U1.10 | length 11.8
  Top Layer w0.254: R4.1@72.197,144.907 72.197,143.576 75.645,140.128 U1.10
  Top Layer w0.5: R4.1@72.771,145.556 P_DS18B20.2
PC3_SOIL: H_Soil.3 U1.11 | length 86.1
  Top Layer w0.254: U1.11 78.719,139.646 82.242,139.646 v1(82.296,139.7)
  Top Layer w0.5: H_Soil.3 H_Soil.3@121.664,86.249
  Bottom Layer w0.254: v1(82.296,139.7) 83.82,138.176 83.82,128.136 90.871,121.085 112.341,121.085 114.3,119.126 114.3,93.853 121.61,86.543 H_Soil.3
PC12: J11.8 U1.53 | length 41
  Top Layer w0.254: U1.53 86.201,144.558 v1(86.614,144.145) ; J11.8 v1(104.14,126.365)
  Bottom Layer w0.254: v1(86.614,144.145) 104.14,126.619 v1(104.14,126.365)
PD2: J11.9 U1.54 | length 45.8
  Top Layer w0.254: U1.54 85.701,143.534 v1(85.725,143.51) ; v1(102.87,126.365) 102.87,112.649 103.781,111.738 105.388,111.738 J11.9
  Bottom Layer w0.254: v1(85.725,143.51) v1(102.87,126.365)
SCL_BARO: P_Baro.3 U1.58 | length 16.6
  Top Layer w0.254: U1.58 83.701,149.6 86.247,152.146 96.139,152.146 P_Baro.3
SDA_BARO: P_Baro.4 U1.59 | length 23
  Top Layer w0.254: U1.59 83.201,149.742 86.748,153.289 96.774,153.289 97.79,152.273 97.79,151.003 P_Baro.4
SWCLK_STLINK: J_STLink.2 U1.49 | length 15.3
  Top Layer w0.254: U1.49 88.201,148.018 v1(88.265,148.082)
  Bottom Layer w0.254: J_STLink.2 87.503,148.971 88.138,148.336 88.138,148.278 88.265,148.151 v1(88.265,148.082)
SWDIO_STLINK: J_STLink.3 U1.46 | length 24
  Top Layer w0.254: U1.46 90.205,143.632 91.816,143.632 v1(91.821,143.637)
  Bottom Layer w0.254: J_STLink.3 84.963,150.114 87.757,147.32 90.551,147.32 91.821,146.05 v1(91.821,143.637)
SWO_STLINK: J_STLink.4 U1.55 | length 17.3
  Top Layer w0.254: U1.55 85.209,146.636 v1@85.209,148.074
  Bottom Layer w0.254: J_STLink.4 82.423,148.844 83.224,148.043 85.178,148.043 v1(85.217,148.082)
VCC: C1.2 H_Soil.1 J10.7 J_GPS_1.5 J_LDR.2 J_POWER.1 J_STLink.1 P_Baro.1 P_DHT22.1 P_DS18B20.1 R3.2 R4.2 R5.1 U1.13 U1.19 U1.32 U1.48 U1.64 U3.3 | length 25.5
  Top Layer w0.254: U1.13 79.558,138.628 v1(79.883,138.303) ; v1(80.701,144.963) U1.64 ; U1.19 81.724,135.151 81.724,136.461 v1(82.042,136.779) ; U1.32 88.201,136.461 v1(88.646,136.906) ; v1(88.519,144.907) 88.798,144.628 U1.48
  Top Layer w0.5: P_DS18B20.1 70.297,148.016 R4.2@70.297,144.907 ; R5.1 104.94,135.382 C1.2 ; C1.2@105.321,135.509 v2(107.696,135.509) ; v2(108.331,144.399) 108.338,144.406 111.206,144.406 U3.3 ; H_Soil.1@114.554,86.251 H_Soil.1 ; v1(118.727,113.304) 118.729,113.302 118.729,111.341 R3.2
VIN: Bat1.2 C2.2 U2.8 | length 4.5
  Top Layer w0.5: U2.8 120.739,139.123 120.739,136.995 Bat1.2 120.817,136.84 120.817,134.864 C2.2
pads on no net: Bat1. J10.1 J10.2 J10.3 J10.4 J10.5 J10.6 J11.1 J11.2 J11.3 J11.4 J11.5 J11.6 J11.7 J_BT.1 J_BT.6 J_DS18B20_2.1 J_GPS_1.1 J_GPS_1.2 J_GPS_1.3 J_GPS_1.6 J_GPS_2.1 J_GPS_2.4 J_GPS_2.5 P_DHT22.3 U1.1 U1.3 U1.4 U1.5 U1.6 U1.8 U1.16 U1.17 U1.20 U1.22 U1.23 U1.24 U1.25 U1.26 U1.27 U1.28 U1.29 U1.30 U1.33 U1.34 U1.35 U1.36 U1.37 U1.38 U1.39 U1.40 U1.41 U1.44 U1.45 U1.50 U1.52 U1.56 U1.57 U1.61 U1.62 U2.5

## Polygon pours and split planes (outlines as drawn)
VCC on VCC "VCC_L02_P001" (solid, pour order 1): 66.802,171.301 66.802,83.566 123.063,83.566 123.063,171.098
GND on GND "GND_L03_P003" (solid, pour order 3): 66.802,84.025 66.802,171.196 123.063,171.196 123.063,83.601

## Keep-outs
Keep-Out Layer:
  rectangle: 69.84,88.554 116.84,114.554
  region: 124.968,172.466 98.968,172.466 98.968,146.466 124.968,146.466

## Silkscreen, mask and mechanical layers (free items; w line width, h text height)
Top Overlay:
  drawing of 139 lines, arcs and shapes, not listed
  text "VCC" at 108.74,165.515 h1.5 r90
  text "GND" at 111.299,165.501 h1.5 r90
  text "USER" at 99.543,163.714 h1.5
  text "RESET" at 120.765,163.714 h1.5
  text "GND" at 92.433,159.269 h1.5
  text "3.3V" at 95.64,159.269 h1.5
  text "3.3V" at 71.236,157.312 h1.5 r90
  text "3.3V" at 90.667,157.312 h1.5 r90
  text "SWO" at 82.92,157.004 h1.5 r90
  text "NRST" at 80.38,156.566 h1.5 r90
  text "SWDIO" at 85.46,155.662 h1.5 r90
  text "SWCLK" at 88,155.379 h1.5 r90
  text "PA0_LDR" at 73.894,154.242 h1.5 r90
  text "RX" at 113.781,150.763 h1.5 r90
  text "TX" at 116.321,150.763 h1.5 r90
  text "GND" at 106.161,150.599 h1.5 r90
  text "3.3V" at 70.728,150.143 h1.5 r90
  text "PC2" at 73.268,150.143 h1.5 r90
  text "GND" at 75.808,150.144 h1.5 r90
  text "9V" at 122.403,136.536 h1.5
  text "3.3V" at 100.212,131.583 h1.5
  text "5V" at 111.566,131.583 h1.5
  text "PWR" at 94.38,130.329 h1.5
  text "USER" at 86.208,130.313 h1.5
  text "GND" at 121.726,123.703 h1.5
  text "NC" at 66.414,111.294 h1.5
  text "data" at 114.555,111.179 h1.5
  text "BT_RX" at 66.343,109.341 h1.5
  text "PC12" at 104.657,107.882 h1.5 r90
  text "PD2" at 107.177,107.883 h1.5 r90
  text "GND" at 109.717,107.883 h1.5 r90
  text "BT_TX" at 66.291,107.388 h1.5
  text "GND" at 66.1,105.669 h1.5
  text "GND" at 120.526,104.847 h1.5
  text "5V" at 66.227,103.957 h1.5
  text "NC" at 120.526,102.298 h1.5
  text "NC" at 66.227,102.246 h1.5
  text "data" at 119.889,99.495 h1.5
  text "VCC" at 120.526,97.08 h1.5
  text "VCC" at 106.923,85.277 h1.5 r90
  text "GND" at 109.463,85.277 h1.5 r90
Bottom Overlay:
  text "VCC" at 94.398,156.528 h1.5
  text "GND" at 94.398,153.937 h1.5
  text "SCL_BARO" at 94.4,151.397 h1.5
  text "SDA_BARO" at 94.4,148.857 h1.5
  text "VCC" at 114.059,88.055 h1.5 r270
  text "GND" at 117.488,88.055 h1.5 r270
  text "PC3_SOIL" at 121.044,88.052 h1.5 r270